# EAGLE board test_filter (EAGLE 7.5.0)
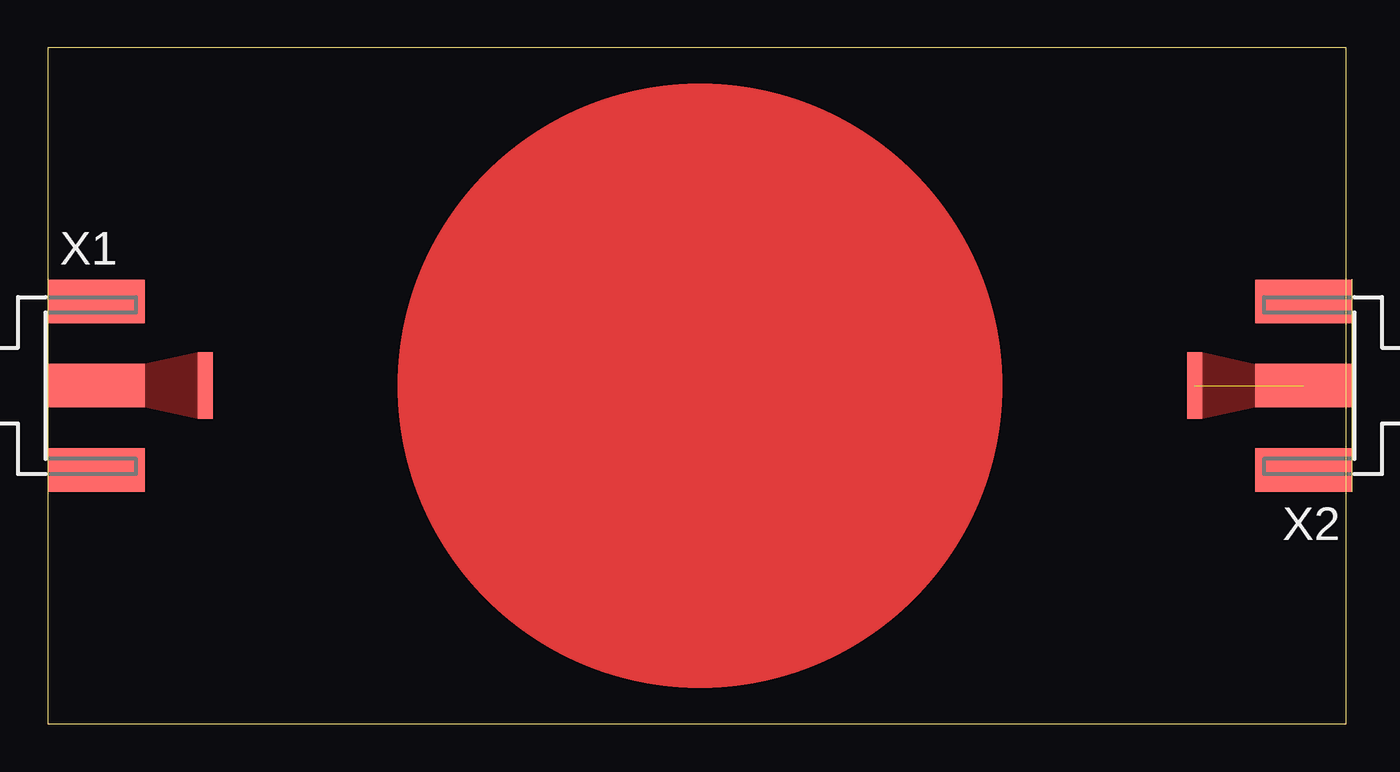
[diagram p0: board, top side]
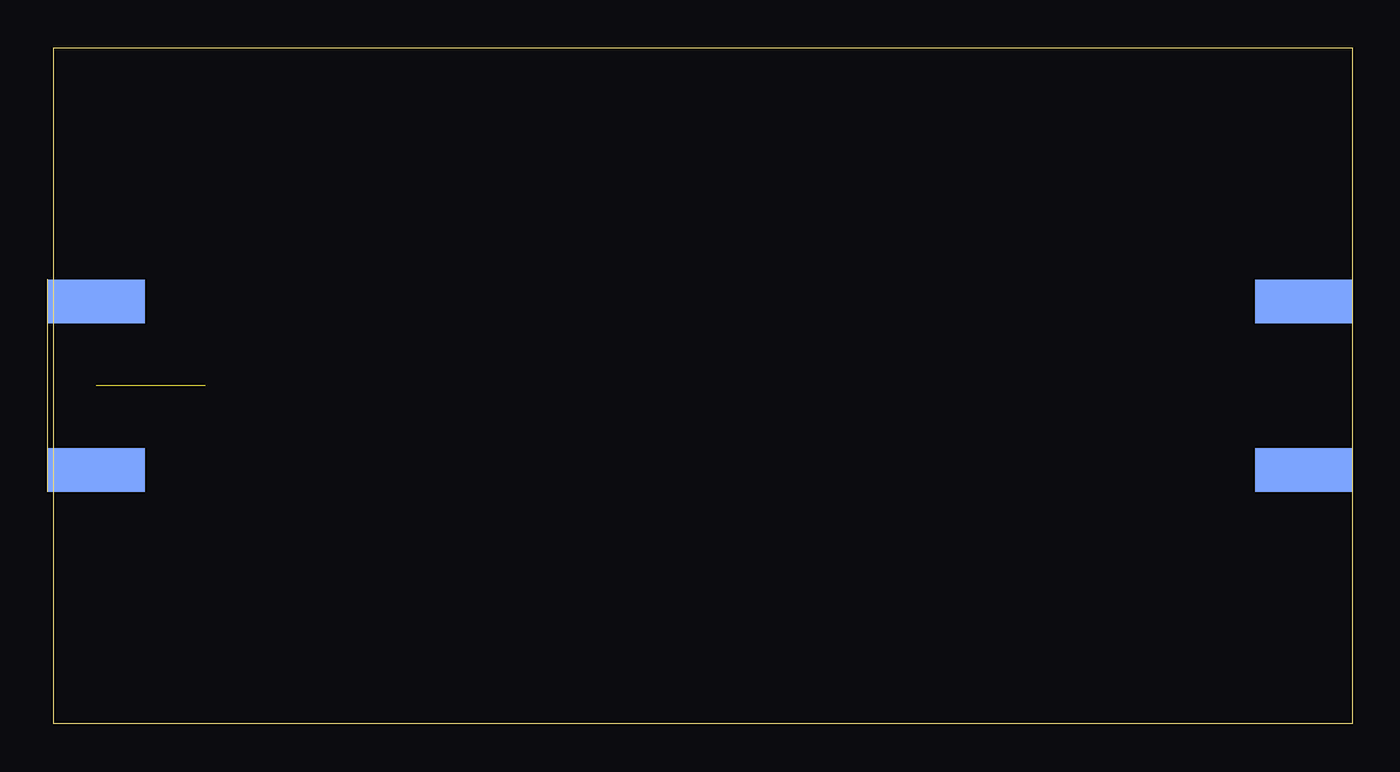
[diagram p1: board, bottom side, seen from below]

Size 68.25 x 35.55 mm. Coordinates in mm from the lower left corner, seen from the top.
Outline: 0,0 68.25,0 68.25,35.55 0,35.55 0,0
Copper layers (1*16): Top 0.035mm / dielectric 1.5mm / Bottom 0.035mm
Design rules "default": minimum track width 10mil, minimum drill 24mil, track to track 8mil, track to pad 8mil, pad to pad 8mil, via to via 8mil, smd to smd 8mil, copper to edge 40mil, drill to drill 8mil, minimum pad ring 10mil, minimum via ring 8mil, stop-mask expansion 4mil, vias tented up to drill 0mil, thermal gap 10mil

## Footprints (pad centres in the part's own frame; a part is rotated, then mirrored left to right if it is on the bottom)
1IN_PIPE_CAP = smd 0.8 x 3.49: IN -26,0; OUT 26,0
J502-ND-142-0701-801/806 = smd 5.08 x 2.286: 1 2.565,0; G@1 2.565,4.42; G@2 2.565,-4.42 | smd 5.08 x 2.286 bottom: G@3 2.565,4.42; G@4 2.565,-4.42

## Placement (x,y rotation side)
FILTER1  2.4GHz  [1IN_PIPE_CAP]  34.29,17.78 0 top
X1  SMA-142-0701-801/806  [J502-ND-142-0701-801/806]  0,17.78 0 top
X2  SMA-142-0701-801/806  [J502-ND-142-0701-801/806]  68.58,17.78 180 top

## Library data of the parts
FILTER1 = ECE532_Parts
X1 X2 = con-coax; MF: JOHNSON COMPONENTS; MPN: 142-0701-801; OC_FARNELL: 1608592; OC_NEWARK: 90F2624

## Nets
IN: FILTER1.IN X1.1
OUT: FILTER1.OUT X2.1

## Tracks (layer width: path | path; a pad name or v marks a point on that pad's centre or on a via)
IN
  pour Top (no thermals): 7.89,19.52 7.89,16.04 5.1,16.64 5.1,18.92
OUT  (1 unrouted)
  pour Top (no thermals): 60.69,16.04 60.68,19.53 63.48,18.92 63.47,16.64